# Altium PCB 8-Solenoid-PCB.PcbDoc
Units mm, origin at the board's own origin, x right, y up, seen from the top; angles counter-clockwise.
Board outline 165 x 124 mm, 2 copper layers (Top Layer, Bottom Layer); 52 components, 27 nets, 119 pads, 0 vias.
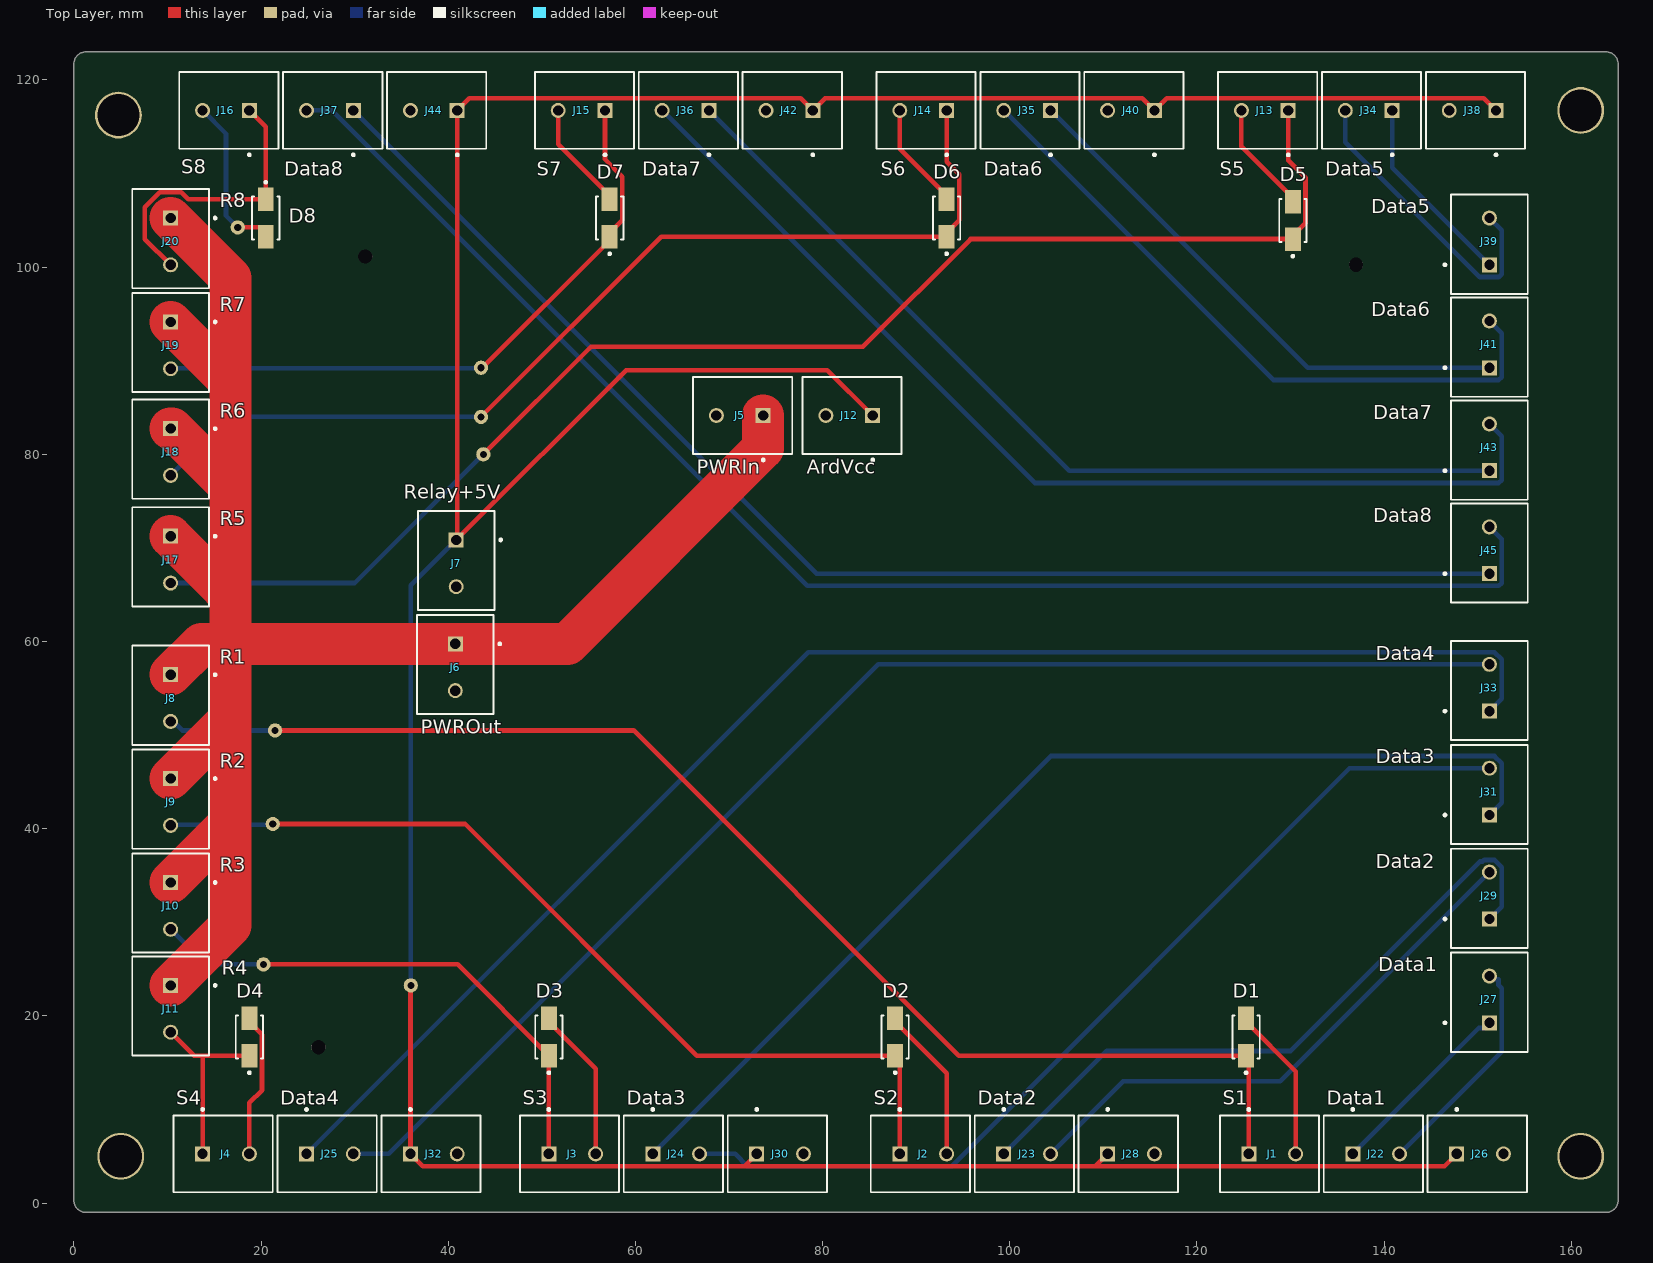
[diagram p0: Top Layer view]
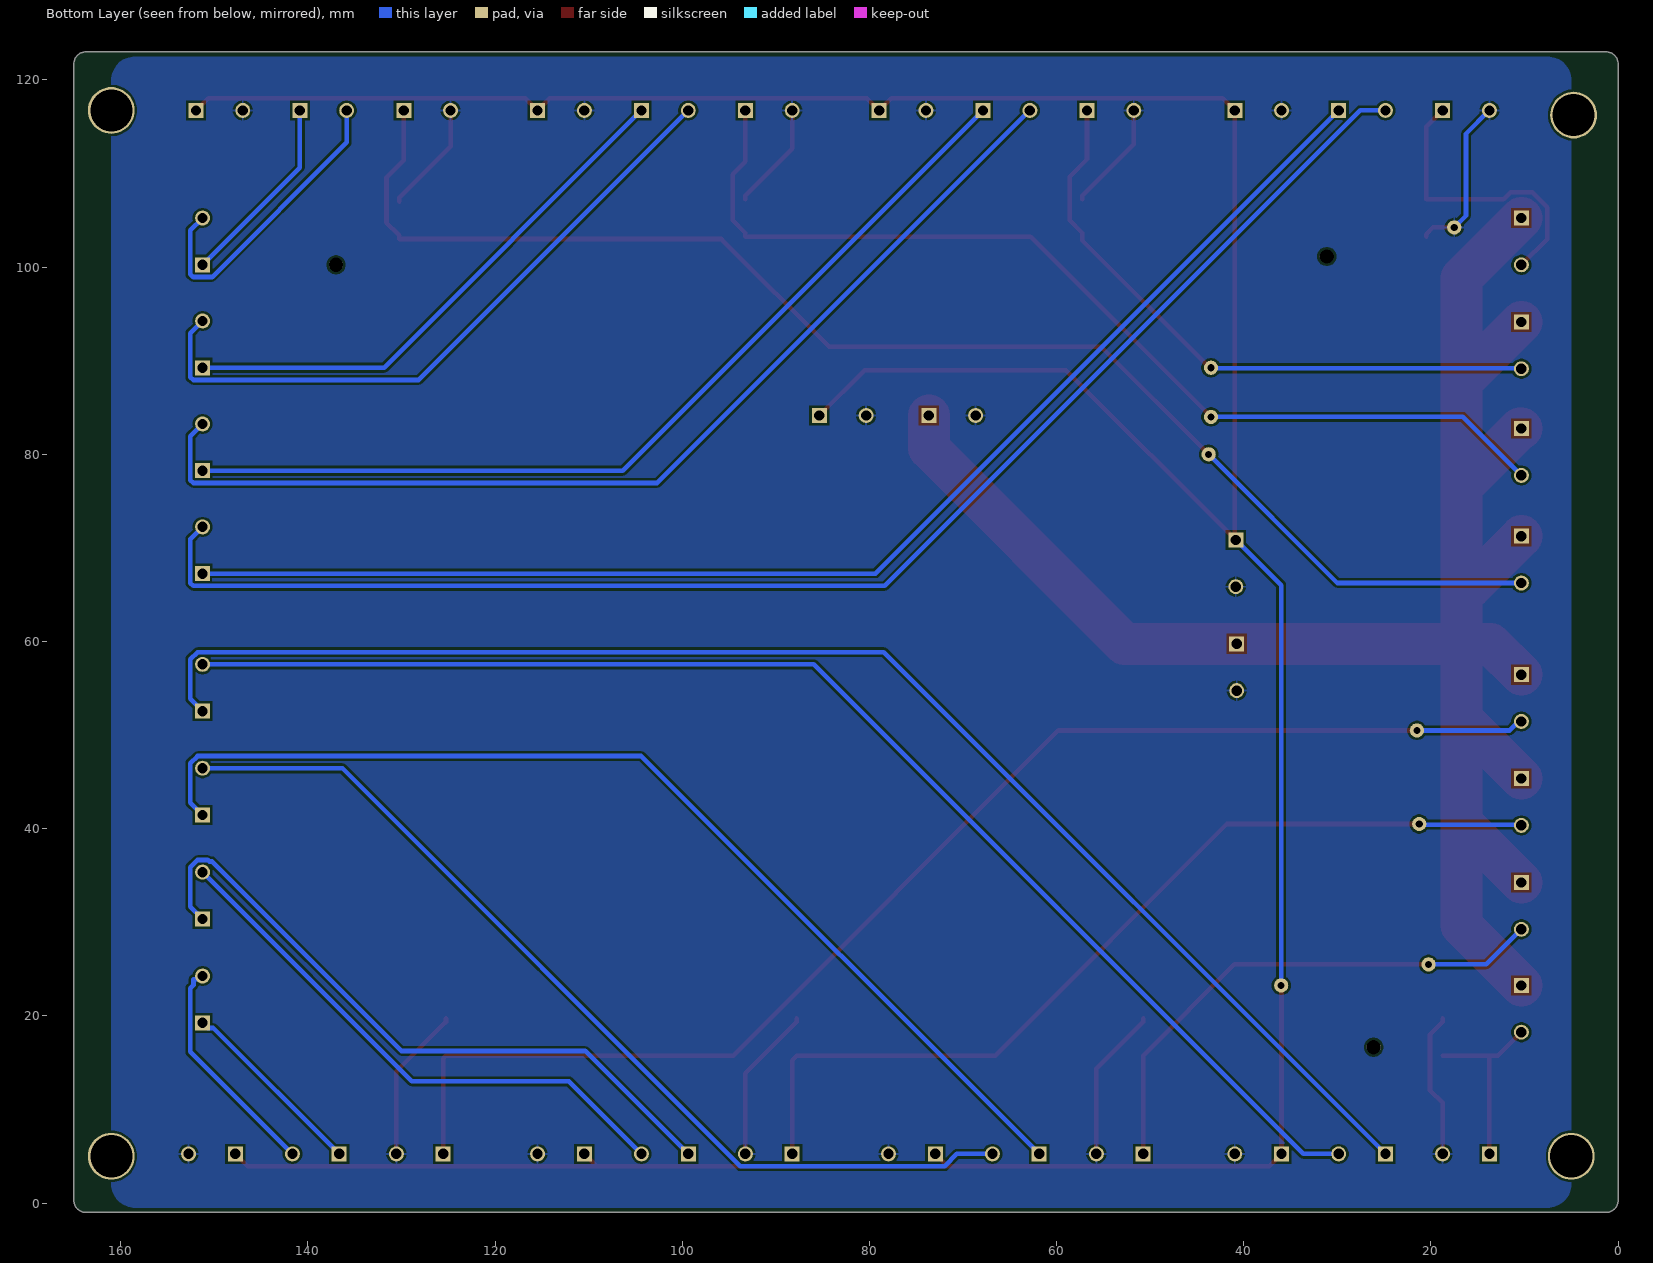
[diagram p1: Bottom Layer view, seen from below]
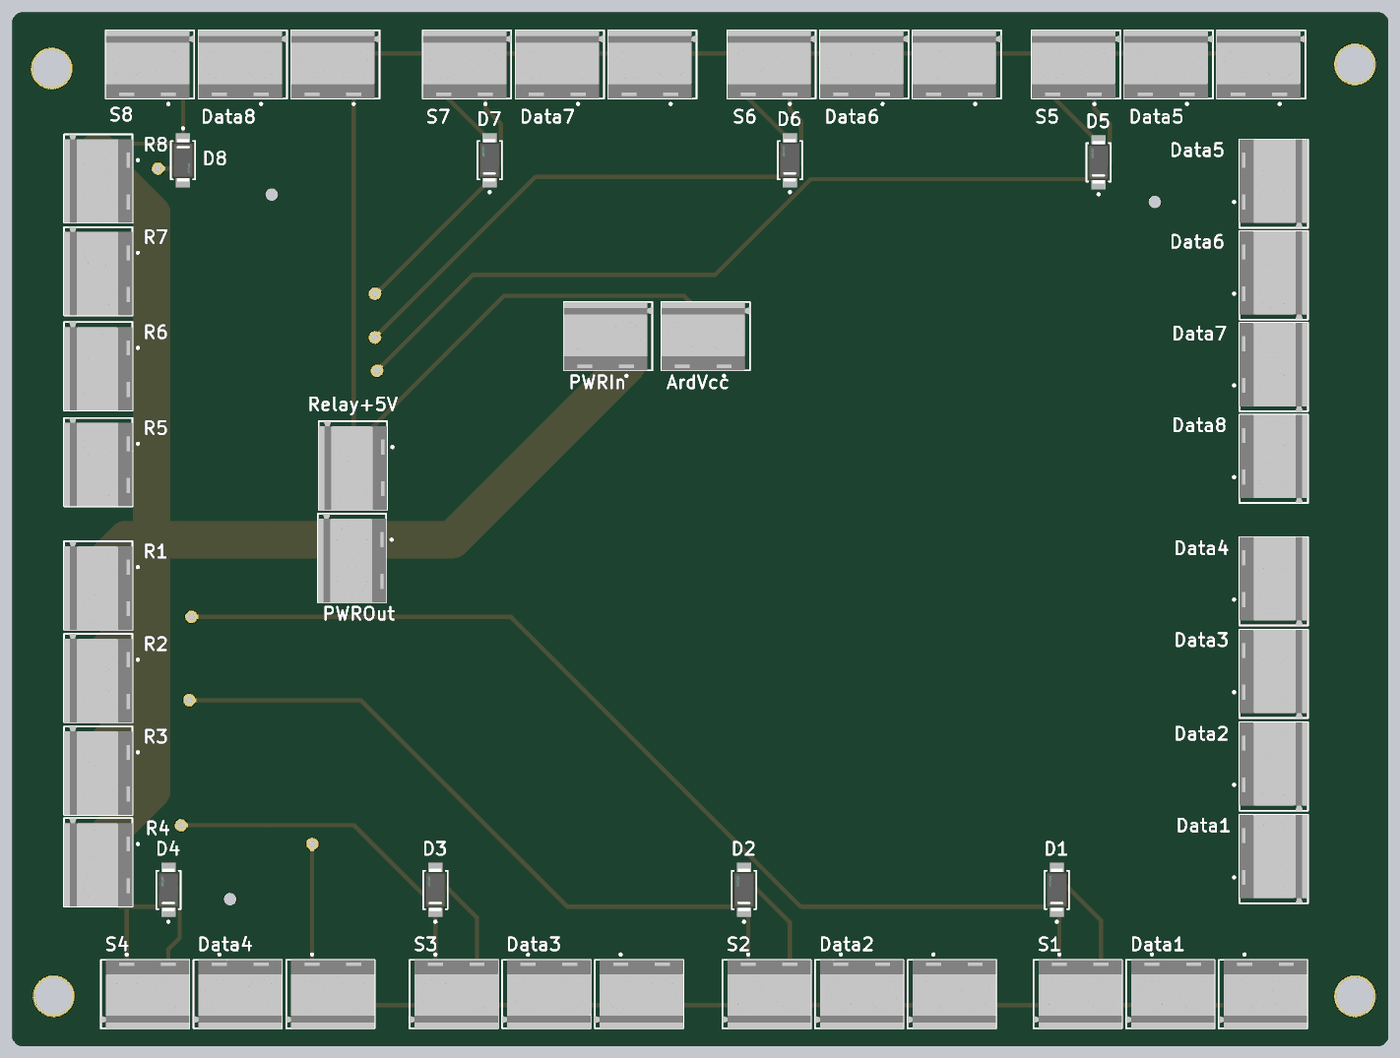
[diagram p2: 3D render of the assembled board from above, using the file's embedded part models]

## Layer stack, top to bottom
Top Solder: solder mask 0.0102, Solder Resist, Dk 3.5
Top Layer: signal copper 0.0356
Dielectric 1: dielectric 0.32, FR-4, Dk 4.8
Bottom Layer: signal copper 0.0356
Bottom Solder: solder mask 0.0102, Solder Resist, Dk 3.5

## Board outline
1.27,-1 cw(c1.27,0.27) 0,0.27 0,121.73 cw(c1.27,121.73) 1.27,123 163.73,123 cw(c163.73,121.73) 165,121.73 165,0.27 cw(c163.73,0.27) 163.73,-1

## Design rules (kind name [scope] priority, off if disabled: settings)
Clearance [All] p1: gap=0.254 ignorepadtopadclearanceinfootprint=FALSE ismatrix=TRUE
PolygonConnect [All] p1: connectstyle=Relief reliefconductorwidth=0.254 reliefentries=4 polygonreliefangle="90 Angle" airgapwidth=0.254
RoutingVias [All] p1: holewidth=0.711 width=1.27 viastyle="Through Hole" minholewidth=0.711 minwidth=1.27 maxholewidth=0.711 maxwidth=1.27
SolderMaskExpansion [All] p1: expansion=0.102 istentingtop=FALSE
Width MaxMinWidth_1 [All] p1: maxlimit=0.254 minlimit=0.254 preferedwidth=0.254
30 further rules are at their usual default settings.

## Components (designator, comment, footprint, x,y, rotation, side; value= is the part's Value field where it differs from the comment)
D1 "ES2BA-13-F" FP-SMA-MFG 125.25,17.75 r90 top value=25pF
D2 "ES2BA-13-F" FP-SMA-MFG 87.75,17.75 r90 top value=25pF
D3 "ES2BA-13-F" FP-SMA-MFG 50.75,17.75 r90 top value=25pF
D4 "ES2BA-13-F" FP-SMA-MFG 18.75,17.75 r90 top value=25pF
D5 "ES2BA-13-F" FP-SMA-MFG 130.25,105 r90 top value=25pF
D6 "ES2BA-13-F" FP-SMA-MFG 93.25,105.25 r90 top value=25pF
D7 "ES2BA-13-F" FP-SMA-MFG 57.25,105.25 r90 top value=25pF
D8 "ES2BA-13-F" FP-SMA-MFG 20.5,105.25 r270 top value=25pF
J1 "282836-2" TECO-282836-2_V 128.046,5.25 r0 top
J2 "282836-2" TECO-282836-2_V 90.75,5.25 r0 top
J3 "282836-2" TECO-282836-2_V 53.25,5.25 r0 top
J4 "282836-2" TECO-282836-2_V 16.25,5.25 r0 top
J5 "282836-2" TECO-282836-2_V 71.15,84.15 r180 top
J6 "282836-2" TECO-282836-2_V 40.75,57.25 r270 top
J7 "282836-2" TECO-282836-2_V 40.85,68.354 r270 top
J8 "282836-2" TECO-282836-2_V 10.336,53.959 r270 top
J9 "282836-2" TECO-282836-2_V 10.336,42.854 r270 top
J10 "282836-2" TECO-282836-2_V 10.336,31.75 r270 top
J11 "282836-2" TECO-282836-2_V 10.336,20.75 r270 top
J12 "282836-2" TECO-282836-2_V 82.85,84.15 r180 top
J13 "282836-2" TECO-282836-2_V 127.25,116.75 r180 top
J14 "282836-2" TECO-282836-2_V 90.75,116.75 r180 top
J15 "282836-2" TECO-282836-2_V 54.25,116.75 r180 top
J16 "282836-2" TECO-282836-2_V 16.25,116.75 r180 top
J17 "282836-2" TECO-282836-2_V 10.336,68.75 r270 top
J18 "282836-2" TECO-282836-2_V 10.336,80.25 r270 top
J19 "282836-2" TECO-282836-2_V 10.336,91.646 r270 top
J20 "282836-2" TECO-282836-2_V 10.336,102.75 r270 top
J22 "282836-2" TECO-282836-2_V 139.15,5.25 r0 top
J23 "282836-2" TECO-282836-2_V 101.854,5.25 r0 top
J24 "282836-2" TECO-282836-2_V 64.354,5.25 r0 top
J25 "282836-2" TECO-282836-2_V 27.354,5.25 r0 top
J26 "282836-2" TECO-282836-2_V 150.254,5.25 r0 top
J27 "282836-2" TECO-282836-2_V 151.25,21.75 r90 top
J28 "282836-2" TECO-282836-2_V 112.959,5.25 r0 top
J29 "282836-2" TECO-282836-2_V 151.25,32.854 r90 top
J30 "282836-2" TECO-282836-2_V 75.459,5.25 r0 top
J31 "282836-2" TECO-282836-2_V 151.25,43.959 r90 top
J32 "282836-2" TECO-282836-2_V 38.459,5.25 r0 top
J33 "282836-2" TECO-282836-2_V 151.25,55.063 r90 top
J34 "282836-2" TECO-282836-2_V 138.354,116.75 r180 top
J35 "282836-2" TECO-282836-2_V 101.854,116.75 r180 top
J36 "282836-2" TECO-282836-2_V 65.354,116.75 r180 top
J37 "282836-2" TECO-282836-2_V 27.354,116.75 r180 top
J38 "282836-2" TECO-282836-2_V 149.459,116.75 r180 top
J39 "282836-2" TECO-282836-2_V 151.25,102.75 r90 top
J40 "282836-2" TECO-282836-2_V 112.959,116.75 r180 top
J41 "282836-2" TECO-282836-2_V 151.25,91.75 r90 top
J42 "282836-2" TECO-282836-2_V 76.459,116.75 r180 top
J43 "282836-2" TECO-282836-2_V 151.25,80.75 r90 top
J44 "282836-2" TECO-282836-2_V 38.459,116.75 r180 top
J45 "282836-2" TECO-282836-2_V 151.25,69.75 r90 top

## Footprints (in the part's own frame and the unit in brackets; to place one, negate y for a bottom-side part, rotate by r counter-clockwise, add the part's x,y. Pads: shape width x height; smd on the part's side, far side on the other; paste and mask are expansions set on the pad)
FP-SMA-MFG [mm]
  rect 2.5x1.7 smd paste+0 mask+0: 1(-2,0) 2(2,0)
  silkscreen extent -3.95,-1.46 2.3,1.46, body extent -3.35,-1.56 3.35,1.56, height 0.25
TECO-282836-2_V [mm] "Female Header, Pitch 5mm, 1 x 2 Position, Height 10mm"
  rect 1.6x1.6 hole 1.1: 1(-2.5,0)
  round 1.6 hole 1.1: 2(2.5,0)
  silkscreen extent -5.6,-4.1 5,4.87, body extent -5.6,-4.1 5,4.1, height 10

## Part data
D1 D2 D3 D4 D5 D6 D7 D8: library part CMP-12791-000037-1, "DIODE GEN PURP 100V 2A SMA", Capacitance=25pF, Forward Current=2A, Manufacturer="Diodes Inc.", Max Junction Temp=+150°C, Max Repetitive Reverse Voltage=100V, Max Surge Forward Current=50A, Package=SMA, Peak Reverse Current=5uA, Temperature="-55°C to +150°C", Temperature Range Low=-55°C, Automotive=No, Category=Diode, ComponentLink2Description=Datasheet, ComponentLink2URL=https://www.diodes.com/assets/Datasheets/ds14002.pdf, Device Class L1="Discrete Semiconductors", Device Class L2=Diodes, Device Class L3="Rectifier Diodes", Digikey Description="DIODE GEN PURP 100V 2A SMA", Footprint Url=https://www.diodes.com/assets/Package-Files/SMA.pdf, Height=2.4mm, Lead Free=Yes, Manufacturer Part Number=ES2BA-13-F, Mouser Description="ES2BA Series 100 V 2 A Surface Mount Super-Fast Rectifier - DO-214AC", Octopart=https://octopart.com/es2ba-13-f-diodes+inc.-14402013, Reverse Voltage=100V, RoHS=TRUE, Standoff Height=0.05mm, Temperature Range High=+150°C
J1 J2 J3 J4 J5 J6 J7 J8 J9 J10 J11 J12 J13 J14 J15 J16 J17 J18 J19 J20 J22 J23 J24 J25 J26 J27 J28 J29 J30 J31 J32 J33 J34 J35 J36 J37 J38 J39 J40 J41 J42 J43 J44 J45: library part CMP-1684-00017-1, "Female Header, Pitch 5 mm, 1 x 2 Position, Height 10 mm, Tail Length 3.5 mm, Rohs, Bulk", Color=Green, Current=13.5A, Manufacturer="TE Connectivity", Package Description="Female Header, Pitch 5 mm, 1 x 2 Position, Height 10 mm, Tail Length 3.5 mm", Package Reference=THD, Standard Package=300, Voltage=300V, 3D Model=282836-2.pdf, Category=Connectors,Interconnects, Clamp Material - Plating=Brass-NickelPlated, Contact Material - Plating=Brass-TinPlated, Datasheet URL=http://www.te.com.cn/commerce/DocumentDelivery/DDEController?Action=showdoc&DocId=Catalog+Section%7F1308389_EUROSTYLE_TERMINAL_BLOCKS%7F0607%7Fpdf%7FEnglish%7FENG_CS_1308389_EUROSTYLE_TERMINAL_BLOCKS_0607.pdf%7F282836-2, Dynamic Catalog=BuchananSeries, Family=TerminalBlocks-WiretoBoard, Featured Product=EurostyleTerminalBlockConnectors, Features=Interlocking(Side), Housing Material=Polyamide(PA66),Nylon6/6, Manufacturer URL=http://www.te.com, Mating Orientation=HorizontalwithBoard, Mounting Type=ThroughHole, Number of Levels=1, Other Names="5ULV-02B / A98076", Packaging=Bulk, Pitch="0.197\"(5.00mm)", Positions Per Level=2, Product Training Modules=Wire-to-BoardEurostyleTerminalBlocks, RoHS Information=282836-2StatementofCompliance, Screw Material - Plating=Brass-NickelPlated, Screw Thread=M3, Series=Buchanan, Torque - Screw=0.68Nm(6Lb-In), Wire Gauge=16-30AWG, Wire Termination=Screw-RisingCageClamp

## Free pads (board coordinates)
  round 1.524 hole 0.762: 8(17.5,104.25) 9(43.75,80) 10(43.5,84) 11(43.5,89.25) 12(21.5,50.5) 13(21.25,40.5) 14(20.25,25.5) 15(36,23.25)
  round 5 hole 4.5: MH(4.75,116.25) MH(5,5) MH(161,5) MH(161,116.75)
  oval 1.512x1.152 hole 1.512 unplated: TH(26.127,16.641) TH(31.127,101.141) TH(137,100.25)

## Nets (pads, with @x,y where several pads share a name; then routed paths per layer and width w, separated by ;. In a path a pad name is that pad's centre, name@x,y a point inside that pad or via, vN(x,y) a via of type N, cw(c..) or ccw(c..) an arc to the next point about the centre after c; other vN are vias at no path point)
Arduino_Vcc: J7.1 J12.1 J26.1 J28.1 J30.1 J32.1 J38.1 J40.1 J42.1 J44.1 pad.15 | length 398.2
  Top Layer w0.5: pad.15 35.959,23.209 J32.1 37.263,3.946 71.655,3.946 ; J7.1 J7.1@40.959,70.963 ; J30.1 71.655,3.946 ; J12.1 80.5,89 58.996,89 J7.1@40.959,70.963 ; J28.1 109.155,3.946 ; J26.1 146.45,3.946 109.155,3.946 ; J38.1 150.655,118.054 116.763,118.054 J40.1 114.155,118.054 80.263,118.054 J42.1 77.655,118.054 42.263,118.054 J44.1 J7.1@40.959,70.963 ; 71.655,3.946 109.155,3.946
  Bottom Layer w0.5: pad.15 36,66.004 J7.1
GND: D1.2 D2.2 D3.2 D4.2 D5.2 D6.2 D7.2 D8.2 J1.2 J2.2 J3.2 J4.2 J5.2 J6.2 J7.2 J12.2 J13.2 J14.2 J15.2 J16.2 J26.2 J28.2 J30.2 J32.2 J38.2 J40.2 J42.2 J44.2 pad.8 | length 118.7
  Top Layer w0.5: pad.8 19.777,104.25 20.5,103.527 D8.2 ; J4.2 18.75,10.701 20.104,12.055 20.104,17.996 18.75,19.35 D4.2 ; D3.2 50.75,19.35 55.75,14.35 J3.2 ; J15.2 51.75,113.15 57.25,107.65 D7.2 ; D2.2 87.75,19.35 93.25,13.85 J2.2 ; J14.2 88.25,112.65 93.25,107.65 D6.2 ; J13.2 124.75,112.9 130.25,107.4 D5.2 ; D1.2 125.25,19.35 130.546,14.054 J1.2
  Bottom Layer w0.5: J16.2 16.25,114.25 16.25,105.5 pad.8
Relay_12V+: J5.1 J6.1 J8.1 J9.1 J10.1 J11.1 J17.1 J18.1 J19.1 J20.1 | length 209.1
  Top Layer w4.5: J11.1 16.75,29.664 16.75,40.664 ; J10.1 16.75,40.664 ; J9.1 16.75,51.769 ; J8.1 13.627,59.75 16.75,59.75 ; J17.1 15.836,65.75 16.75,65.75 ; J18.1 10.5,82.75 16.75,76.5 ; J19.1 16.75,87.731 ; J20.1 16.75,98.836 16.75,87.731 ; J5.1 73.65,80.65 52.75,59.75 16.75,59.75 ; 16.75,40.664 16.75,51.769 ; 16.75,51.769 16.75,59.75 ; 16.75,59.75 16.75,65.75 ; 16.75,65.75 16.75,76.5 ; 16.75,76.5 16.75,87.731
Relay_NC1: D1.1 J1.1 J8.2 pad.12 | length 140.3
  Top Layer w0.5: pad.12 59.813,50.5 94.563,15.75 D1.1 125.546,15.454 J1.1
  Bottom Layer w0.5: J8.2 10.611,51.459 11.569,50.5 pad.12
Relay_NC2: D2.1 J2.1 J9.2 pad.13 | length 98.4
  Top Layer w0.5: pad.13 41.825,40.5 66.575,15.75 D2.1 88.25,15.25 J2.1
  Bottom Layer w0.5: J9.2 10.409,40.427 21.177,40.427 pad.13
Relay_NC3: D3.1 J3.1 J10.2 pad.14 | length 56.5
  Top Layer w0.5: pad.14 41,25.5 D3.1 J3.1
  Bottom Layer w0.5: J10.2 14.086,25.5 pad.14
Relay_NC4: D4.1 J4.1 J11.2 | length 19.9
  Top Layer w0.5: J11.2 12.836,15.75 13.75,15.75 ; J4.1 13.75,15.75 ; D4.1 13.75,15.75
Relay_NC5: D5.1 J13.1 J17.2 pad.9 | length 150.2
  Top Layer w0.5: pad.9 55.25,91.5 84.313,91.5 95.813,103 D5.1 130.25,103.4 131.604,104.754 131.604,109.55 129.75,111.404 J13.1
  Bottom Layer w0.5: J17.2 30,66.25 pad.9
Relay_NC6: D6.1 J14.1 J18.2 pad.10 | length 108.1
  Top Layer w0.5: pad.10 62.75,103.25 D6.1 93.25,103.65 94.604,105.004 94.604,109.925 93.25,111.279 J14.1
  Bottom Layer w0.5: J18.2 16.586,84 pad.10
Relay_NC7: D7.1 J15.1 J19.2 pad.11 | length 67.8
  Top Layer w0.5: pad.11 43.65,89.25 57.25,102.85 D7.1 57.25,103.65 58.604,105.004 58.604,109.675 56.75,111.529 J15.1
  Bottom Layer w0.5: J19.2 10.388,89.198 43.448,89.198 pad.11
Relay_NC8: D8.1 J16.1 J20.2 | length 31.4
  Top Layer w0.5: J20.2 7.582,103.004 7.582,106.391 9.195,108.004 11.476,108.004 12.23,107.25 D8.1 20.5,115 J16.1
Sensor_Data1: J22.2 J27.2 | length 24.4
  Bottom Layer w0.5: J22.2 152.554,16.154 152.554,22.946 152.228,23.272 152.228,23.924 151.576,23.924 J27.2
Sensor_Data2: J23.2 J29.2 | length 59.4
  Bottom Layer w0.5: J23.2 112.104,13 128.896,13 J29.2
Sensor_Data3: J24.2 J31.2 | length 102.5
  Bottom Layer w0.5: J24.2 70.646,5.25 71.95,3.946 93.79,3.946 136.303,46.459 J31.2
Sensor_Data4: J25.2 J33.2 | length 143.1
  Bottom Layer w0.5: J25.2 33.646,5.25 85.958,57.563 J33.2
Sensor_Data5: J34.2 J39.2 | length 32.7
  Bottom Layer w0.5: J34.2 135.854,113.333 150.241,98.946 152.259,98.946 152.554,99.241 152.554,103.946 J39.2
Sensor_Data6: J35.2 J41.2 | length 71.8
  Bottom Layer w0.5: J35.2 128.158,87.946 152.259,87.946 152.554,88.241 152.554,92.946 J41.2
Sensor_Data7: J36.2 J43.2 | length 112.9
  Bottom Layer w0.5: J36.2 102.658,76.946 152.259,76.946 152.554,77.241 152.554,81.946 J43.2
Sensor_Data8: J37.2 J45.2 | length 155.4
  Bottom Layer w0.5: J37.2 27.541,116.75 78.345,65.946 152.259,65.946 152.554,66.241 152.554,70.946 J45.2
Sensor_Sck1: J22.1 J27.1 | length 20.4
  Bottom Layer w0.5: J22.1 150.1,18.7 150.7,18.7 J27.1
Sensor_Sck2: J23.1 J29.1 | length 72.6
  Bottom Layer w0.5: J23.1 110.354,16.25 130,16.25 150.25,36.5 150.552,36.5 150.71,36.658 151.79,36.658 152.554,35.894 152.554,31.658 J29.1
Sensor_Sck3: J24.1 J31.1 | length 114.7
  Bottom Layer w0.5: J24.1 104.367,47.763 151.79,47.763 152.554,46.999 152.554,42.763 J31.1
Sensor_Sck4: J25.1 J33.1 | length 156.3
  Bottom Layer w0.5: J25.1 78.471,58.867 151.79,58.867 152.554,58.103 152.554,53.867 J33.1
Sensor_Sck5: J34.1 J39.1 | length 20.8
  Bottom Layer w0.5: J34.1 140.854,110.646 J39.1
Sensor_Sck6: J35.1 J41.1 | length 58.3
  Bottom Layer w0.5: J35.1 131.854,89.25 J41.1
Sensor_Sck7: J36.1 J43.1 | length 99.3
  Bottom Layer w0.5: J36.1 106.354,78.25 J43.1
Sensor_Sck8: J37.1 J45.1 | length 141.9
  Bottom Layer w0.5: J37.1 79.354,67.25 J45.1

## Polygon pours and split planes (outlines as drawn)
GND on Bottom Layer "GND_L02_P000" (solid, pour order 0): 158.46,122.5 cw(c158.46,119.96) 161,119.96 161,2.04 cw(c158.46,2.04) 158.46,-0.5 7.54,-0.5 cw(c7.54,2.04) 5,2.04 5,119.96 cw(c7.54,119.96) 7.54,122.5 22.25,122.5

## Silkscreen, mask and mechanical layers (free items; w line width, h text height)
Top Overlay:
  text "S8" at 11.458,110.004 h1.52
  text "Data8" at 22.458,109.754 h1.52
  text "S7" at 49.458,109.754 h1.52
  text "Data7" at 60.708,109.754 h1.52
  text "S6" at 86.208,109.754 h1.52
  text "Data6" at 97.208,109.754 h1.52
  text "S5" at 122.458,109.754 h1.52
  text "Data5" at 133.708,109.754 h1.52
  text "R8" at 15.558,106.404 h1.52
  text "Data5" at 138.608,105.754 h1.52
  text "R7" at 15.558,95.3 h1.52
  text "Data6" at 138.608,94.754 h1.52
  text "R6" at 15.558,83.904 h1.52
  text "Data7" at 138.858,83.754 h1.52
  text "PWRIn" at 66.558,77.904 h1.52
  text "ArdVcc" at 78.308,77.904 h1.52
  text "Relay+5V" at 35.254,75.262 h1.52
  text "Data8" at 138.858,72.754 h1.52
  text "R5" at 15.558,72.404 h1.52
  text "Data4" at 139.108,58.004 h1.52
  text "R1" at 15.558,57.613 h1.52
  text "PWROut" at 37.058,50.154 h1.52
  text "Data3" at 139.108,47.004 h1.52
  text "R2" at 15.558,46.508 h1.52
  text "Data2" at 139.108,35.754 h1.52
  text "R3" at 15.558,35.404 h1.52
  text "Data1" at 139.358,24.754 h1.52
  text "R4" at 15.808,24.404 h1.52
  text "S4" at 10.958,10.504 h1.52
  text "Data4" at 22.063,10.504 h1.52
  text "S3" at 47.958,10.504 h1.52
  text "Data3" at 59.063,10.504 h1.52
  text "S2" at 85.458,10.504 h1.52
  text "Data2" at 96.563,10.504 h1.52
  text "S1" at 122.754,10.504 h1.52
  text "Data1" at 133.858,10.504 h1.52
Mechanical 1:
  lines w0.254: 0,0.27 ccw(c1.27,0.27) 1.27,-1 163.73,-1 ccw(c163.73,0.27) 165,0.27 165,121.73 ccw(c163.73,121.73) 163.73,123 17,123 1.27,123 ccw(c1.27,121.73) 0,121.73 0,0.27